# Altium PCB PCB.PcbDoc
Units mm, origin at the board's own origin, x right, y up, seen from the top; angles counter-clockwise.
Board outline 85.4 x 55.12 mm, 2 copper layers (Top Layer, Bottom Layer); 30 components, 36 nets, 163 pads, 15 vias.
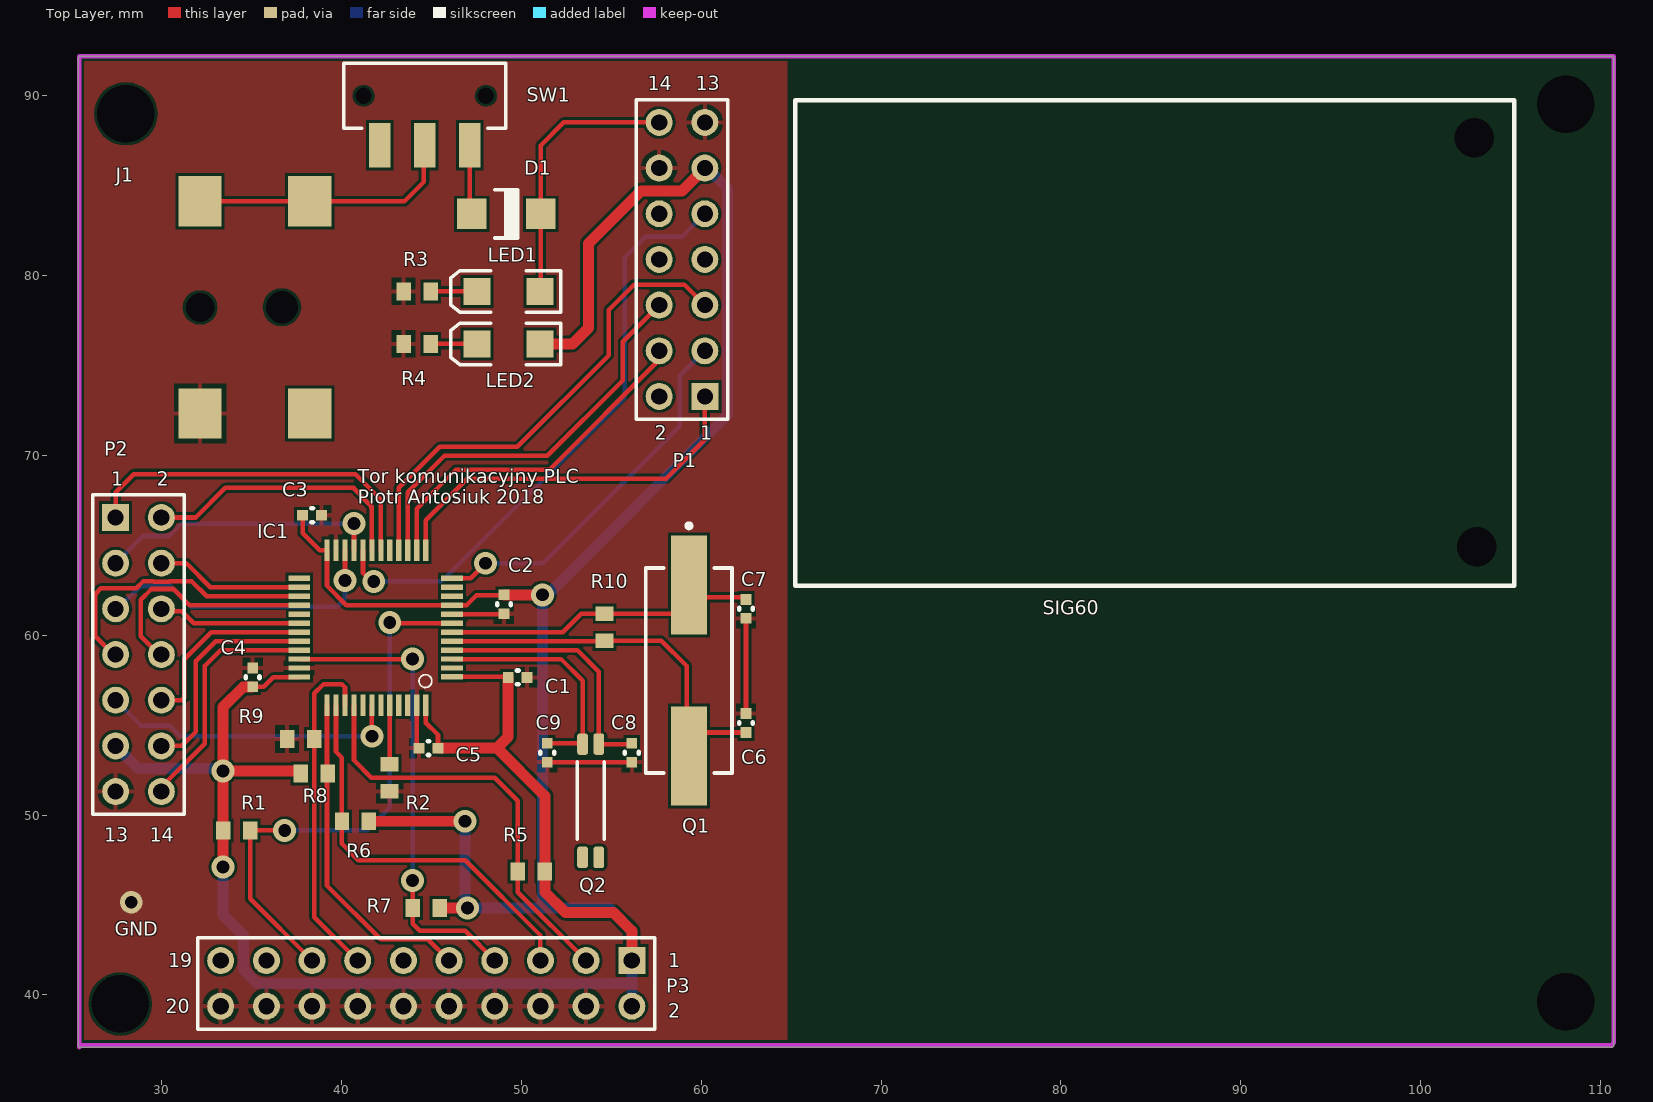
[diagram p0: Top Layer view]
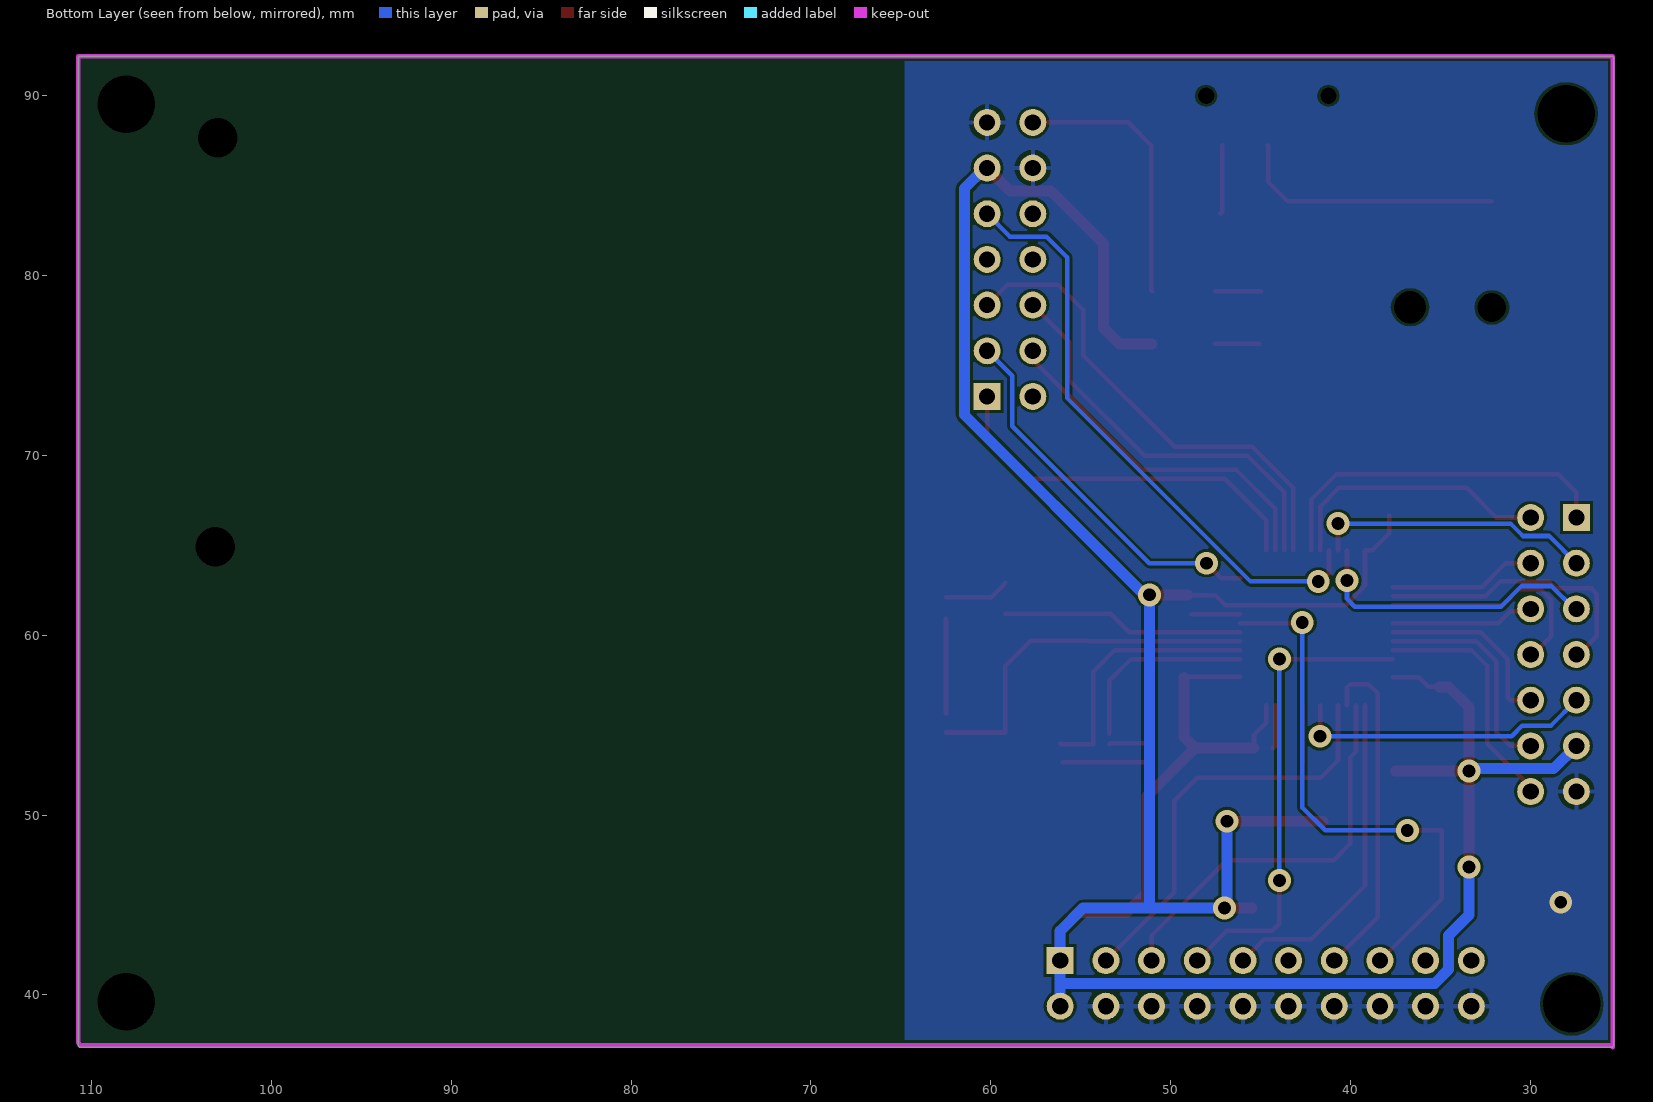
[diagram p1: Bottom Layer view, seen from below]

## Layer stack, top to bottom
Top Solder: solder mask 0.0102, Solder Resist, Dk 3.5
Top Layer: signal copper 0.0356
Dielectric 1: dielectric 0.32, FR-4, Dk 4.8
Bottom Layer: signal copper 0.0356
Bottom Solder: solder mask 0.0102, Solder Resist, Dk 3.5

## Board outline
25.35,37.237 cw(c25.475,37.263) 25.348,37.263 25.348,92.075 cw(c25.475,92.075) 25.475,92.202 110.617,92.202 cw(c110.617,92.075) 110.744,92.075 110.744,37.211 cw(c110.617,37.211) 110.617,37.084 25.475,37.084 cw(c25.475,37.211)

## Design rules (kind name [scope] priority, off if disabled: settings)
Clearance [All] p1: gap=0.152 ignorepadtopadclearanceinfootprint=FALSE except(0: Arc-Hole Track-Hole SMDPad-Hole THPad-Hole Via-Hole Fill-Hole Poly-Hole Region-Hole Text-Hole)
HoleSize [All] p1: absolutevalues=TRUE maxlimit=10 minlimit=0.025 maxpercent=80.000 minpercent=20.000
MinimumSolderMaskSliver [All] p1: minsoldermaskwidth=0.051
PolygonConnect [All] p1: connectstyle=Relief reliefconductorwidth=0.254 reliefentries=4 polygonreliefangle="90 Angle" airgapwidth=0.254
RoutingVias [All] p1: holewidth=0.711 width=1.27 viastyle="Through Hole" minholewidth=0.711 minwidth=1.27 maxholewidth=0.711 maxwidth=1.27
SilkToSilkClearance [All] p1: silktosilkclearance=0
SilkToSolderMaskClearance [IsPad] p1: minsilkscreentomaskgap=0.025 clearancetoexposedcopper=TRUE
SolderMaskExpansion [All] p1: expansion=0
Width [All] p1: maxlimit=0.61 minlimit=0.254 preferedwidth=0.254 minimp=50.000000 maximp=50.000000 favimp=50.000000
26 further rules are at their usual default settings.

## Classes and differential pairs
net class PB[0..15]: PB0 PB1 PB2 PB3 PB4 PB5 PB6 PB7 PB8 PB9 PB10 PB11 PB12 PB13 PB14 PB15
net class PA[0..15]: PA0 PA1 PA2 PA3 PA4 PA5 PA6 PA7 PA8 PA9 PA10 PA11 PA12 PA13 PA14 PA15

## Components (designator, comment, footprint, x,y, rotation, side; value= is the part's Value field where it differs from the comment)
C1 "Comment" CAPC1005 49.784,57.658 r0 top
C2 "Comment" CAPC1005 49.022,61.722 r270 top
C3 "Comment" CAPC1005 38.354,66.675 r0 top
C4 "Comment" CAPC1005 35.052,57.658 r90 top
C5 "Comment" CAPC1005 44.831,53.721 r180 top
C6 "Comment" CAPC1005 62.484,55.118 r270 top
C7 "Comment" CAPC1005 62.484,61.468 r90 top
C8 "Comment" CAPC1005 56.134,53.467 r90 top
C9 "Comment" CAPC1005 51.435,53.467 r90 top
D1 "Comment" KESE-DO-214AC_V 49.149,83.439 r180 top
IC1 "Comment" STM32F103C8T6 41.91,60.452 r180 top
J1 "PJ-002AH-SMT" PJ-002-AH-SMT 35.179,78.232 r0 top
LED1 "Comment" 3.2X1.6X1.1 49.276,79.121 r180 top
LED2 "Comment" 3.2X1.6X1.1 49.276,76.2 r180 top
P1 "Comment" HDR2X7 60.198,73.279 r90 top
P2 "Comment" HDR2X7 27.432,66.548 r270 top
P3 "Comment" HDR2X10 56.134,41.91 r180 top
Q1 "Comment" ECS-80-18-5PX-TR_V 59.309,58.039 r270 top
Q2 "Comment" ECS-ECX-71-4_V 53.848,50.8 r270 top
R1 "Comment" RESC1608X55X25ML10T15 34.163,49.149 r180 top
R2 "Comment" RESC1608X55X25ML10T15 42.672,52.07 r270 top
R3 "Comment" RESC1608X55X25ML10T15 44.196,79.121 r0 top
R4 "Comment" RESC1608X55X25ML10T15 44.196,76.2 r0 top
R5 "Comment" RESC1608X55X25ML10T15 50.546,46.863 r0 top
R6 "Comment" RESC1608X55X25ML10T15 40.767,49.657 r0 top
R7 "Comment" RESC1608X55X25ML10T15 44.704,44.831 r0 top
R8 "Comment" RESC1608X55X25ML10T15 38.481,52.324 r180 top
R9 "Comment" RESC1608X55X25ML10T15 37.719,54.229 r0 top
R10 "Comment" RESC1608X55X25ML10T15 54.61,60.452 r270 top
SW1 "Comment" CKCP-JS102011SAQN-3_V 44.617,88.624 r180 top

## Footprints (in the part's own frame and the unit in brackets; to place one, negate y for a bottom-side part, rotate by r counter-clockwise, add the part's x,y. Pads: shape width x height; smd on the part's side, far side on the other; paste and mask are expansions set on the pad)
3.2X1.6X1.1 [mm] "SMT LED; 2 Flat Leads"
  rect 1.5x1.5 smd: 1(-1.75,0) 2(1.75,0)
  silkscreen extent -2.9,-1.15 3.2,1.15
CAPC1005 [mm] "Chip Capacitor 1005"
  rect 0.6x0.6 smd: 1(-0.525,0) 2(0.525,0)
  silkscreen extent -0.05,-0.38 0.05,0.38, body extent -0.57,-0.3 0.57,0.3, height 0.2
CKCP-JS102011SAQN-3_V [mm] "SMD, 3-Leads, Body 9x3.6mm, Pitch 2.5mm"
  rect 1.2x2.5 smd: 1(-2.5,1.375) 2(0,1.375) 3(2.5,1.375)
  round 0.6 hole 0.9 unplated: MH1(-3.4,-1.375) MH2(3.4,-1.375)
  silkscreen extent -4.5,-3.17 4.5,0.43, body extent -4.5,-5.18 4.5,2.37, height 3.52
ECS-80-18-5PX-TR_V [mm] "SMD, 2-Leads, Body 11.4x4.8mm, Height 4.3mm"
  rect 5.5x2 smd: 1(-4.75,0) 2(4.75,0)
  silkscreen extent -8.17,-2.4 5.7,2.4, body extent -6.6,-2.4 6.6,2.4, height 4.3
ECS-ECX-71-4_V [mm] "SMT Crystal, 4-Leads, Body 7x1.5mm (max)"
  rrect50% 1.2x0.6 smd: 1(-3.15,-0.45) 2(3.15,-0.45) 3(3.15,0.45) 4(-3.15,0.45)
  silkscreen extent -2.15,-0.75 2.15,0.75, body extent -3.59,-0.75 3.55,0.74, height 1.41
HDR2X7 [mm] "Connector; Header; 7x2 Position"
  rect 1.5x1.5 hole 0.9: 1(0,0)
  round 1.5 hole 0.9: 2(0,2.54) 3(2.54,0) 4(2.54,2.54) 5(5.08,0) 6(5.08,2.54) 7(7.62,0) 8(7.62,2.54) 9(10.16,0) 10(10.16,2.54) 11(12.7,0) 12(12.7,2.54) 13(15.24,0) 14(15.24,2.54)
  silkscreen extent -1.27,-1.27 16.51,3.81
HDR2X10 [mm] "Connector; Header; 10x2 Position"
  rect 1.5x1.5 hole 0.9: 1(0,0)
  round 1.5 hole 0.9: 2(0,2.54) 3(2.54,0) 4(2.54,2.54) 5(5.08,0) 6(5.08,2.54) 7(7.62,0) 8(7.62,2.54) 9(10.16,0) 10(10.16,2.54) 11(12.7,0) 12(12.7,2.54) 13(15.24,0) 14(15.24,2.54) 15(17.78,0) 16(17.78,2.54) 17(20.32,0) 18(20.32,2.54) 19(22.86,0) 20(22.86,2.54)
  silkscreen extent -1.27,-1.27 24.13,3.81
KESE-DO-214AC_V [mm] "SMD, 2-Leads, Body 4.2925x2.6925mm, Height 2.438mm"
  rect 1.655x1.67 smd: 1(-1.917,0) 2(1.917,0)
  silkscreen extent -0.64,-1.35 0.64,1.35, body extent -2.15,-1.35 2.15,1.35, height 2.44
PJ-002-AH-SMT [mm]
  rect 2.4x2.8 smd: 1(-3.048,5.9) 1(3.048,5.9) 2(-3.048,-5.9) 3(3.048,-5.9)
  round 1.4 hole 1.6 unplated: 9(-3.048,0)
  round 1.524 hole 1.8 unplated: 10(1.5,0)
  body extent -8.05,-6.3 6.75,6.3, height 11
RESC1608X55X25ML10T15 [mm] "Chip Resistor, 2-Leads, Body 1.60x0.80mm, IPC Low Density"
  rect 0.8x1 smd: 1(-0.75,0) 2(0.75,0)
  body extent -0.85,-0.45 0.85,0.45, height 0.55
STM32F103C8T6 [mm]
  rect 1.2x0.3 smd: 1(-4.225,2.75) 2(-4.225,2.275) 3(-4.225,1.775) 4(-4.225,1.275) 5(-4.225,0.775) 6(-4.225,0.275) 7(-4.225,-0.225) 8(-4.225,-0.725) 9(-4.225,-1.225) 10(-4.225,-1.725) 11(-4.225,-2.225) 12(-4.225,-2.725) 25(4.275,-2.725) 26(4.275,-2.225) 27(4.275,-1.725) 28(4.275,-1.225) 29(4.275,-0.725) 30(4.275,-0.225) 31(4.275,0.275) 32(4.275,0.775) 33(4.275,1.275) 34(4.275,1.775) 35(4.275,2.275) 36(4.275,2.775)
  rect 0.3x1.2 smd: 13(-2.775,-4.275) 14(-2.275,-4.275) 15(-1.775,-4.275) 16(-1.275,-4.275) 17(-0.775,-4.275) 18(-0.275,-4.275) 19(0.225,-4.275) 20(0.725,-4.275) 21(1.225,-4.275) 22(1.725,-4.275) 23(2.225,-4.275) 24(2.725,-4.275) 37(2.725,4.35) 38(2.225,4.35) 39(1.725,4.35) 40(1.225,4.35) 41(0.725,4.35) 42(0.225,4.35) 43(-0.275,4.35) 44(-0.775,4.35) 45(-1.275,4.35) 46(-1.775,4.35) 47(-2.275,4.35) 48(-2.775,4.35)
  silkscreen extent -3.11,2.65 -2.4,3.35, body extent -4.5,-4.45 4.5,4.55, height 1.6

## Part data
C1 C2 C3 C4 C5 C6 C7 C8 C9: library part CAP-NP, "Capacitor, Non-Polarized"
  C1 C2 C3 C4 C5: C=100nF
  C6 C7: C=22pF
  C8 C9: C=10pF
D1: library part KESE-D_K1A2-2
IC1: library part STM32F103C8T6, "STM32F103C8T6", Supplier Part Number 1=1447637, HelpURL=http://dl.btc.pl/kamami_wa/stm32f103_x6_x8_xb.pdf, Supplier 1=Farnell
J1: "DC Power Jack", Supplier Part Number 1=PJ-002AH, HelpURL=http://www.cui.com/product/resource/pj-102a.pdf, Supplier 1="NAC Semi"
LED1 LED2: library part LED2, "Typical RED, GREEN, YELLOW, AMBER GaAs LED", LatestRevisionDate=17-Jul-2002, LatestRevisionNote="Re-released for DXP Platform.", PackageDescription="SM LED; 2 Flat Leads", PackageReference=3.2X1.6X1.1, PackageVersion=Feb-2002, Published=8-Jun-2000, Publisher="Altium Limited"
P1 P2: library part "Header 7X2", "Header, 7-Pin, Dual row", LatestRevisionDate=17-Jul-2002, LatestRevisionNote="Re-released for DXP Platform.", Publisher="Altium Limited"
P3: library part "Header 10X2", "Header, 10-Pin, Dual row", LatestRevisionDate=17-Jul-2002, LatestRevisionNote="Re-released for DXP Platform.", Publisher="Altium Limited"
Q1: library part XTAL_1-2-2, f=8MHz
Q2: library part ECS-ECX-71-4, f=32,768kHz
R1 R2 R3 R4 R5 R6 R7 R8 R9 R10: library part RES-2
  R1 R2 R5 R6 R7 R8 R9: R=10k
  R3: R=600
  R4: R=100
  R10: R=1M
SW1: library part SW-SPDT-3

## Free pads (board coordinates)
  round 1.524 hole 3.2 unplated: 11(27.686,39.497) 11(28,89) 11(108.077,39.624) 11(108.077,89.535)
  round 1.524 hole 2.2 unplated: 11(102.975,87.675) 11(103.125,64.925)

## Via types
v1: diameter 1.27, hole 0.711, Top Layer to Bottom Layer, 15 vias

## Nets (pads, with @x,y where several pads share a name; then routed paths per layer and width w, separated by ;. In a path a pad name is that pad's centre, name@x,y a point inside that pad or via, vN(x,y) a via of type N, cw(c..) or ccw(c..) an arc to the next point about the centre after c; other vN are vias at no path point)
3V3: C1.1 C2.1 C3.1 C4.1 C5.1 IC1.1 IC1.9 IC1.24 IC1.36 IC1.48 LED2.1 P1.11 P2.11 P3.1 P3.2 R1.2 R5.2 R6.2 R7.2 R8.2 | length 187.6
  Top Layer w0.254: C4.1 35.67,57.133 36.195,57.658 IC1.36@37.635,57.658 ; R8.2@37.477,52.451 R8.2@37.604,52.324 ; C3.1 37.829,65.676 38.778,64.727 IC1.24 39.185,62.752 40.26,61.677 IC1.9 46.945,61.677 47.498,62.23 49.005,62.23 C2.1 ; IC1.48 44.685,55.137 45.356,54.466 C5.1 ; IC1.1 C1.1@49.215,57.702
  Top Layer w0.61: v1(33.401,47.117) v1(33.401,52.451) ; C4.1 34.527,57.133 33.401,56.007 v1(33.401,52.451) ; R8.2@37.477,52.451 v1(33.401,52.451) ; R6.2 v1(46.863,49.657) ; C5.1 48.641,53.721 ; R7.2 v1(46.99,44.831) ; C2.1 v1(51.164,62.247) ; C1.1 49.259,54.339 48.641,53.721 ; LED2.1 52.832,76.2 53.721,77.089 53.721,81.788 56.642,84.709 58.928,84.709 P1.11 ; P3.1 56.134,43.561 55.118,44.577 52.451,44.577 51.296,45.732 R5.2 51.296,51.066 48.641,53.721
  Bottom Layer w0.254: v1@46.926,44.895 v1(46.99,44.831) ; P3.1@56.134,41.656 P3.1 ; P1.11 P1.11@60.325,85.979
  Bottom Layer w0.61: P2.11 28.702,52.578 33.274,52.578 v1(33.401,52.451) ; v1(33.401,47.117) 33.401,44.45 34.544,43.307 34.544,41.402 35.306,40.64 56.134,40.64 ; v1(46.863,49.657) 46.863,44.958 v1@46.926,44.895 ; v1(46.99,44.831) 51.164,44.831 ; P3.2 56.134,40.64 ; P3.1@56.134,41.656 56.134,40.64 ; P3.1 56.134,43.561 54.864,44.831 51.164,44.831 ; P1.11@60.325,85.979 61.468,84.836 61.468,72.263 51.452,62.247 v1(51.164,62.247) 51.164,44.831
GND: C1.2 C2.2 C3.2 C4.2 C5.2 C6.1 C7.1 C8.1 C9.1 IC1.8 IC1.23 IC1.35 IC1.47 J1.2 P1.12 P1.13 P2.13 P3.4 P3.6 P3.8 P3.10 P3.12 P3.14 P3.16 P3.18 P3.20 R2.2 R3.1 R4.1 R9.1 | length 15
  Top Layer w0.254: IC1.47 44.185,53.842 C5.2 ; IC1.8 C2.2@48.858,61.177 ; C9.1 C8.1@56.007,52.942 ; C6.1 C7.1
  other v1: 28.3,45.15
NetC6_2: C6.2 IC1.5 Q1.2 R10.2 | length 20.6
  Top Layer w0.254: IC1.5 54.585,59.677 R10.2 57.773,59.702 59.182,58.293 59.182,54.61 59.199,54.593 C6.2
NetC7_2: C7.2 IC1.6 Q1.1 R10.1 | length 17.1
  Top Layer w0.254: IC1.6 52.303,60.177 53.328,61.202 R10.1 Q1.1@59.182,61.202 ; Q1.1@59.182,62.916 Q1.1 59.978,62.12 C7.2@62.484,62.12
NetC8_2: C8.2 IC1.4 Q2.4 | length 14.5
  Top Layer w0.254: IC1.4 53.091,59.177 54.298,57.97 Q2.4 56.092,53.95 C8.2
NetC9_2: C9.2 IC1.3 Q2.1 | length 12.7
  Top Layer w0.254: IC1.3 52.194,58.677 53.398,57.473 Q2.1@53.398,54.524 ; C9.2 53.356,53.992 Q2.1
NetD1_1: D1.1 LED1.1 P1.14 | length 15.3
  Top Layer w0.254: LED1.1 51.066,79.162 D1.1 51.066,87.237 52.349,88.519 P1.14
NetD1_2: D1.2 SW1.1 | length 3.9
  Top Layer w0.254: SW1.1 47.117,83.554 D1.2
NetIC1_7: IC1.7 P3.15 R1.1 | length 30.7
  Top Layer w0.254: v1(36.83,49.149) R1.1 34.913,45.351 P3.15 ; v1(42.672,60.706) 42.701,60.677 IC1.7
  Bottom Layer w0.254: v1(36.83,49.149) 41.402,49.149 42.672,50.419 v1(42.672,60.706)
NetIC1_44: IC1.44 R2.1 | length 3.3
  Top Layer w0.254: R2.1 42.685,52.833 IC1.44
NetJ1_1: J1.1 SW1.2 | length 14.9
  Top Layer w0.254: J1.1@32.131,84.132 38.227,84.132 43.492,84.132 44.577,85.217 44.577,87.209 SW1.2
NetLED1_2: LED1.2 R3.2 | length 2.6
  Top Layer w0.254: R3.2 LED1.2
NetLED2_2: LED2.2 R4.2 | length 2.5
  Top Layer w0.254: R4.2@45.073,76.2 LED2.2
PA2: IC1.12 P1.3 | length 20.9
  Top Layer w0.254: IC1.12 47.175,63.177 v1(48.006,64.008)
  Bottom Layer w0.254: v1(48.006,64.008) 51.181,64.008 58.801,71.628 58.801,74.422 P1.3
PA3: IC1.13 P1.1 | length 21.5
  Top Layer w0.254: IC1.13 44.685,66.402 46.99,68.707 58.039,68.707 60.198,70.866 P1.1
PA4: IC1.14 P1.4 | length 19.7
  Top Layer w0.254: IC1.14 44.185,67.045 46.355,69.215 51.562,69.215 57.658,75.311 P1.4
PA5: IC1.15 P1.6 | length 22.8
  Top Layer w0.254: IC1.15 43.685,67.942 45.72,69.977 51.435,69.977 55.626,74.168 55.626,76.327 P1.6
PA6: IC1.16 P1.5 | length 27.1
  Top Layer w0.254: IC1.16 43.185,68.204 45.454,70.473 49.772,70.473 54.864,75.565 54.864,78.105 56.261,79.502 59.055,79.502 P1.5
PA9: IC1.30 P2.6 | length 8.2
  Top Layer w0.254: P2.6@29.718,61.341 31.115,61.341 31.779,60.677 IC1.30
PA10: IC1.31 P2.10 | length 10.5
  Top Layer w0.254: P2.10 31.103,56.388 31.242,56.527 31.242,58.674 32.745,60.177 IC1.31
PA11: IC1.32 P2.12 | length 12.4
  Top Layer w0.254: P2.12 31.103,53.848 31.877,54.622 31.877,58.547 33.007,59.677 IC1.32
PA12: IC1.33 P2.14 | length 13.6
  Top Layer w0.254: P2.14 29.972,51.562 32.385,53.975 32.385,58.293 33.269,59.177 IC1.33
PA13: IC1.34 P3.7 R7.1 | length 26.4
  Top Layer w0.254: IC1.34 37.638,58.674 v1(43.942,58.674) ; v1(43.942,46.355) 43.942,44.843 R7.1 43.954,43.954 44.347,43.561 46.863,43.561 P3.7
  Bottom Layer w0.254: v1(43.942,46.355) v1(43.942,58.674)
PA14: IC1.37 P3.9 R8.1 | length 18.5
  Top Layer w0.254: IC1.37 39.185,46.067 42.164,43.088 44.796,43.088 P3.9
PA15: IC1.38 P3.5 R6.1 | length 22.4
  Top Layer w0.254: IC1.38 39.685,53.528 40.017,53.196 R6.1 40.017,48.399 40.918,47.498 46.863,47.498 51.054,43.307 P3.5
PB0: IC1.18 P2.1 | length 20
  Top Layer w0.254: P2.1 27.432,67.945 28.448,68.961 40.767,68.961 42.185,67.543 IC1.18
PB1: IC1.19 P2.2 | length 15.4
  Top Layer w0.254: P2.2 31.877,66.548 33.528,68.199 40.64,68.199 ; 40.669,68.199 40.64,68.199 ; 41.656,67.056 41.656,67.183 40.64,68.199 ; IC1.19 41.685,67.183
PB2: IC1.20 P1.9 | length 33.5
  Top Layer w0.254: IC1.20 41.185,63.463 41.656,62.992 v1(41.783,62.992)
  Bottom Layer w0.254: v1(41.783,62.992) 45.553,62.992 55.753,73.192 55.753,81.026 56.896,82.169 58.928,82.169 P1.9
PB3: IC1.39 P3.13 R9.2 | length 18.8
  Top Layer w0.254: IC1.39 40.185,57.097 40.005,57.277 38.989,57.277 38.481,56.769 38.481,44.323 P3.13
PB4: IC1.40 P3.3 R5.1 | length 23.6
  Top Layer w0.254: IC1.40 40.685,53.041 41.656,52.07 48.514,52.07 49.784,50.8 49.784,46.875 R5.1 49.796,45.708 P3.3
PB6: IC1.42 P2.9 | length 16.8
  Top Layer w0.254: v1(41.685,54.385) IC1.42
  Bottom Layer w0.254: P2.9 28.841,54.979 30.44,54.979 31.034,54.385 v1(41.685,54.385)
PB10: IC1.21 P2.3 | length 15.9
  Top Layer w0.254: P2.3 P2.3@27.559,64.135 ; IC1.21 v1(40.685,66.212)
  Bottom Layer w0.254: P2.3 28.943,65.519 30.398,65.519 31.091,66.212 v1(40.685,66.212) v1@40.767,66.294
PB11: IC1.22 P2.5 | length 16.5
  Top Layer w0.254: v1(40.185,63.045) IC1.22
  Bottom Layer w0.254: P2.5@27.559,61.468 28.829,62.738 30.48,62.738 31.623,61.595 39.751,61.595 40.185,62.029 v1(40.185,63.045)
PB13: IC1.26 P2.4 | length 8.2
  Top Layer w0.254: P2.4 31.369,64.008 32.7,62.677 IC1.26
PB14: IC1.27 P2.7 | length 15.8
  Top Layer w0.254: P2.7@27.305,58.928 26.289,59.944 26.289,62.288 26.612,62.611 28.575,62.611 28.956,62.992 29.533,62.992 29.546,62.979 30.398,62.979 30.411,62.992 31.667,62.992 32.49,62.169 IC1.27@37.627,62.169
PB15: IC1.28 P2.8 | length 13
  Top Layer w0.254: P2.8@29.845,58.928 28.829,59.944 28.829,61.976 29.426,62.573 30.566,62.573 30.579,62.586 30.632,62.586 31.541,61.677 IC1.28 ; P2.8 P2.8@29.972,59.055
pads on no net: IC1.2 IC1.10 IC1.11 IC1.17 IC1.25 IC1.29 IC1.41 IC1.43 IC1.45 IC1.46 J1.3 J1.9 J1.10 P1.2 P1.7 P1.8 P1.10 P3.11 P3.17 P3.19 Q2.2 Q2.3 SW1.3 SW1.MH1 SW1.MH2

## Polygon pours and split planes (outlines as drawn)
GND on Top Layer "Top Layer" (solid, pour order 3): 25.35,37.237 cw(c25.475,37.263) 25.348,37.263 25.348,92.075 cw(c25.475,92.075) 25.475,92.202 64.77,92.202 64.77,37.084 25.475,37.084 cw(c25.475,37.211)
GND on Bottom Layer "Bottom Layer" (solid, pour order 4): 25.35,37.237 cw(c25.475,37.263) 25.348,37.263 25.348,92.075 cw(c25.475,92.075) 25.475,92.202 64.77,92.202 64.77,37.084 25.475,37.084 cw(c25.475,37.211)

## Keep-outs
Keep-Out Layer:
  lines w0.254: 25.4,37.084 25.527,37.211 110.617,37.211 110.744,37.338 110.744,92.202 25.4,92.202 25.4,37.084

## Silkscreen, mask and mechanical layers (free items; w line width, h text height)
Top Overlay:
  lines w0.254: 65.225,62.75 105.2,62.75 105.2,89.75 65.225,89.75 65.225,62.75
  text "14" at 57.023,90.297 h0.77
  text "13" at 59.69,90.297 h0.77
  text "2" at 57.404,70.866 h0.77
  text "1" at 59.944,70.866 h0.77
  text "1" at 27.178,68.326 h0.77
  text "2" at 29.718,68.326 h0.77
  text "Tor komunikacyjny PLC / Piotr Antosiuk 2018" at 40.894,67.31 h0.77
  text "SIG60" at 79,61.15 h0.77
  text "13" at 26.797,48.514 h0.77
  text "14" at 29.337,48.514 h0.77
  text "GND" at 27.375,43.3 h0.77
  text "19" at 30.353,41.529 h0.77
  text "1" at 58.166,41.529 h0.77
  text "20" at 30.226,38.989 h0.77
  text "2" at 58.166,38.735 h0.77